# EAGLE board Silkscreen (EAGLE 7.7.0)
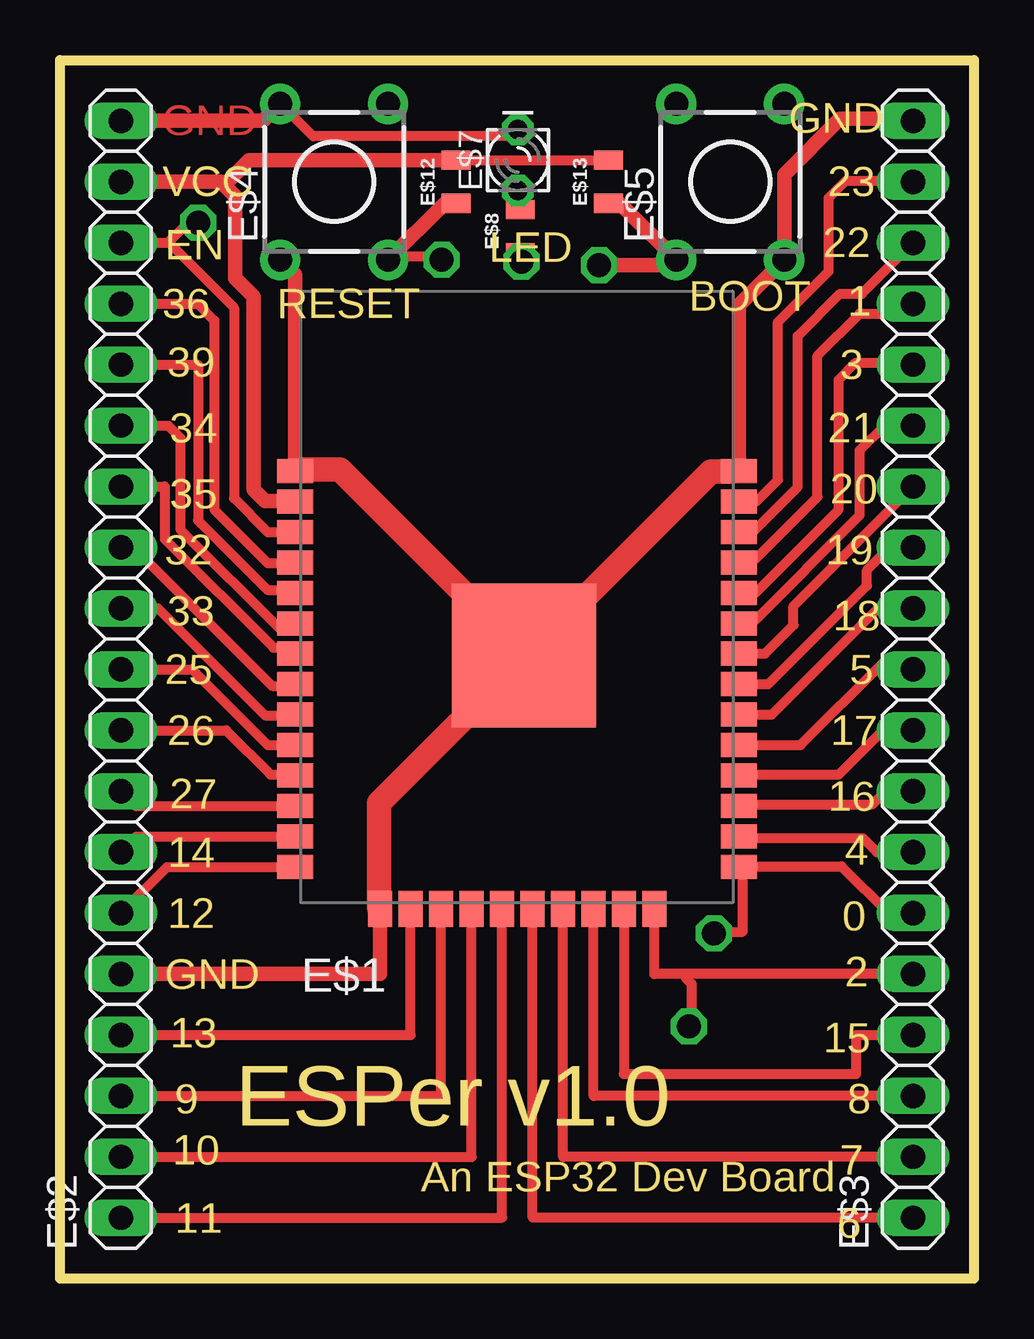
[diagram p0: board, top side]
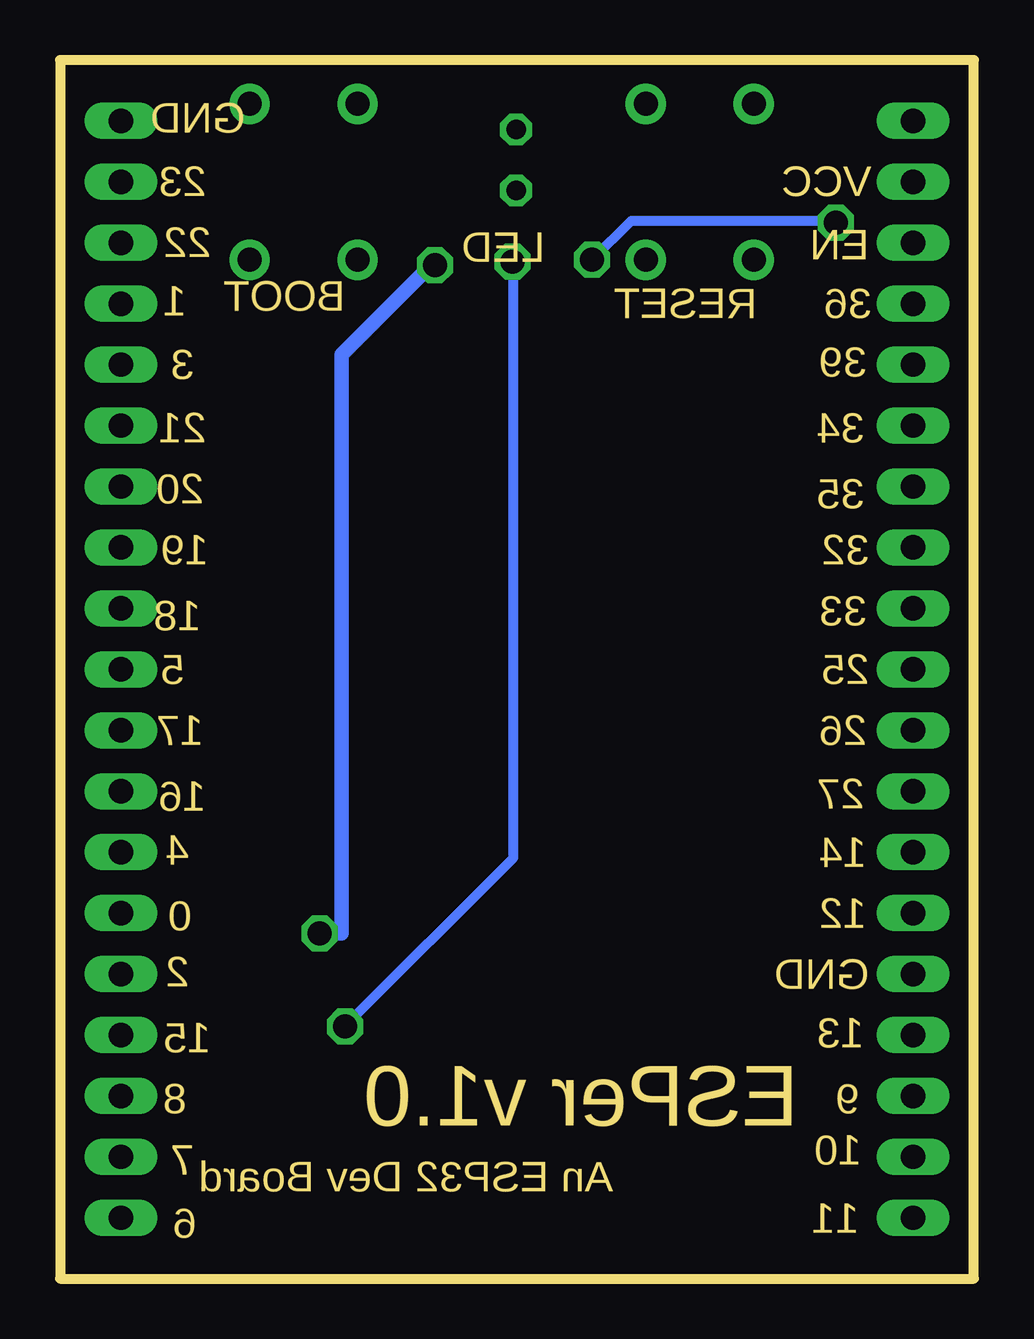
[diagram p1: board, bottom side, seen from below]

Size 38.1 x 50.8 mm. Coordinates in mm from the lower left corner, seen from the top.
Outline: 0,50.8 38.1,50.8 38.1,0 0,0 0,50.8
Copper layers (1*16): Top 0.035mm / dielectric 1.5mm / Bottom 0.035mm
Design rules "default": minimum track width 10mil, minimum drill 24mil, track to track 8mil, track to pad 8mil, pad to pad 8mil, via to via 8mil, smd to smd 8mil, copper to edge 40mil, drill to drill 8mil, minimum pad ring 10mil, minimum via ring 8mil, stop-mask expansion 4mil, vias tented up to drill 0mil, thermal gap 10mil

## Footprints (pad centres in the part's own frame; a part is rotated, then mirrored left to right if it is on the bottom)
ESP-WROOM-32 = smd 1.5 x 1: 1 -9.25,7; 2 -9.25,5.73; 3 -9.25,4.46; 4 -9.25,3.19; 5 -9.25,1.92; 6 -9.25,0.65; 7 -9.25,-0.62; 8 -9.25,-1.89; 9 -9.25,-3.16; 10 -9.25,-4.43; 11 -9.25,-5.7; 12 -9.25,-6.97; 13 -9.25,-8.24; 14 -9.25,-9.51; 25 9.25,-9.51; 26 9.25,-8.24; 27 9.25,-6.97; 28 9.25,-5.7; 29 9.25,-4.43; 30 9.25,-3.16; 31 9.25,-1.89; 32 9.25,-0.62; 33 9.25,0.65; 34 9.25,1.92; 35 9.25,3.19; 36 9.25,4.46; 37 9.25,5.73; 38 9.25,7 | smd 1 x 1.5: 15 -5.7,-11.25; 16 -4.43,-11.25; 17 -3.16,-11.25; 18 -1.89,-11.25; 19 -0.62,-11.25; 20 0.65,-11.25; 21 1.92,-11.25; 22 3.19,-11.25; 23 4.46,-11.25; 24 5.73,-11.25 | smd 6 x 6: GND 0.3,-0.7
1X19 = drill 1.016 long: 1 -22.86,0; 2 -20.32,0; 3 -17.78,0; 4 -15.24,0; 5 -12.7,0; 6 -10.16,0; 7 -7.62,0; 8 -5.08,0; 9 -2.54,0; 10 0,0; 11 2.54,0; 12 5.08,0; 13 7.62,0; 14 10.16,0; 15 12.7,0; 16 15.24,0; 17 17.78,0; 18 20.32,0; 19 22.86,0
TL1105 = drill 1 pad 1.676: 1 -2.25,3.25; 2 2.25,3.25; 3 -2.25,-3.25; 4 2.25,-3.25
LED_LD260 = drill 0.813 octagon: A -1.27,0; K 1.27,0
0805 = smd 0.8 x 1.2: 1 -0.9,0; 2 0.9,0

## Placement (x,y rotation side)
E$1  [ESP-WROOM-32]  19.05,26.67 0 top
E$2  [1X19]  2.54,25.4 90 top
E$3  [1X19]  35.56,25.4 90 top
E$4  [TL1105]  11.43,45.72 0 top
E$5  [TL1105]  27.94,45.72 0 top
E$7  [LED_LD260]  19.09,46.63 90 top
E$8  [0805]  19.19,43.66 90 top
E$12  [0805]  16.51,45.72 90 top
E$13  [0805]  22.86,45.72 90 top

## Library data of the parts
E$1 = esp32
E$2 E$3 = pinhead
E$4 E$5 = switch
E$7 = eagle-ltspice
E$8 E$12 E$13 = SparkFun-Resistors

## Nets
S$1: E$1.1 E$4.3
S$2: E$2.19 E$4.1
S$3: E$1.3 E$2.17
S$4: E$1.4 E$2.16
S$5: E$1.5 E$2.15
S$6: E$1.6 E$2.14
S$7: E$1.7 E$2.13
S$8: E$1.8 E$2.12
S$9: E$1.9 E$2.11
S$10: E$1.10 E$2.10
S$11: E$1.11 E$2.9
S$12: E$1.12 E$2.8
S$13: E$1.13 E$2.7
S$14: E$1.14 E$2.6
S$15: E$1.15 E$2.5
S$16: E$1.16 E$2.4
S$17: E$1.17 E$2.3
S$18: E$1.18 E$2.2
S$19: E$1.19 E$2.1
S$20: E$1.20 E$3.1
S$21: E$1.21 E$3.2
S$22: E$1.22 E$3.3
S$23: E$1.23 E$3.4
S$24: E$1.24 E$3.5
S$25: E$1.25 E$3.6
S$26: E$1.26 E$3.7
S$27: E$1.27 E$3.8
S$28: E$1.28 E$3.9
S$29: E$1.29 E$3.10
S$30: E$1.30 E$3.11
S$31: E$1.31 E$3.12
S$32: E$1.32 E$3.13
S$33: E$1.33 E$3.14
S$34: E$1.34 E$3.15
S$35: E$1.35 E$3.16
S$36: E$1.36 E$3.17
S$37: E$1.37 E$3.18
S$39: E$4.2
S$40: E$5.1
S$42: E$1.2 E$2.18 E$12.2 E$13.2
S$43: E$5.2
S$44: E$4.4 E$12.1
S$45: E$1.38 E$3.19 E$5.4
S$51: E$5.3 E$13.1

## Tracks (layer width: path | path; a pad name or v marks a point on that pad's centre or on a via)
S$1
  Top 0.61: E$4.3 9.8,41.85 E$1.1
S$2
  Top 0.61: E$2.19 8.47,48.26 E$4.1
S$3
  Top 0.406: E$2.17 4.54,43.18 7.25,40.47 7.25,32.53 8.66,31.12 E$1.3
S$4
  Top 0.406: E$2.16 5.73,40.64 6.43,39.94 6.43,32.06 8.66,29.83 9.77,29.83 E$1.4
S$5
  Top 0.406: E$2.15 5.76,38.1 5.76,31.6 8.65,28.71 9.68,28.71 E$1.5
S$6
  Top 0.406: E$2.14 4.52,35.56 5.02,35.06 5.02,31.24 9.19,27.06 9.55,27.06 E$1.6
S$7
  Top 0.406: E$2.13 4.36,33.02 4.37,33 4.37,30.83 8.9,26.3 9.55,26.3 E$1.7
S$8
  Top 0.406: E$2.12 3.07,30.48 8.84,24.71 9.73,24.71 E$1.8
S$9
  Top 0.406: E$2.11 4.09,27.94 8.55,23.48 9.77,23.48 E$1.9
S$10
  Top 0.406: E$2.10 5.51,25.4 8.66,22.24 E$1.10
S$11
  Top 0.406: E$2.9 6.93,22.86 8.78,21.01 9.76,21.01 E$1.11
S$12
  Top 0.406: E$2.8 3.16,19.7 E$1.12
S$13
  Top 0.406: E$2.7 3.19,18.43 E$1.13
S$14
  Top 0.406: E$2.6 4.46,17.16 E$1.14
S$15
  Top 0.61: E$2.5 13.35,12.7 E$1.15
S$16
  Top 0.406: E$2.4 14.62,10.16 E$1.16
S$17
  Top 0.406: E$2.3 15.89,7.62 E$1.17
S$18
  Top 0.406: E$2.2 17.16,5.08 E$1.18
S$19
  Top 0.406: E$2.1 18.43,2.54 E$1.19
S$20
  Top 0.406: E$3.1 19.7,2.54 E$1.20
S$21
  Top 0.406: E$3.2 20.97,5.08 E$1.21
S$22
  Top 0.406: E$3.3 22.24,7.62 E$1.22
S$23
  Top 0.406: E$1.23 23.51,8.53 33.19,8.53 33.19,10.16 E$3.4
S$24
  Top 0.406: E$3.5 24.78,12.7 E$1.24
S$25
  Top 0.406: E$3.6 34.53,15.24 32.58,17.19 28.33,17.19 E$1.25 28.26,17.12
S$26
  Top 0.406: E$1.26 28.37,18.36 33.46,18.36 34.04,17.78 E$3.7
S$27
  Top 0.406: E$1.27 28.38,19.77 33.87,19.77 34.42,20.32 E$3.8
S$28
  Top 0.406: E$1.28 28.34,21.01 32.46,21.01 34.31,22.86 E$3.9
S$29
  Top 0.406: E$1.29 30.87,22.24 34.28,25.65 35.31,25.65 E$3.10
S$30
  Top 0.406: E$1.30 29.67,23.51 34.11,27.95 E$3.11
S$31
  Top 0.406: E$1.31 29.53,24.78 33.64,28.89 33.64,29.54 34.63,30.53 35.51,30.53 E$3.12
S$32
  Top 0.406: E$1.32 29.39,26.05 30.58,27.24 30.58,28.04 E$3.13
S$33
  Top 0.406: E$1.33 28.84,27.32 33.34,31.83 33.34,34.53 34.4,35.59 35.53,35.59 E$3.14
S$34
  Top 0.406: E$1.34 28.99,28.59 32.46,32.06 32.46,37.47 33.17,38.18 35.48,38.18 E$3.15
S$35
  Top 0.406: E$1.35 28.85,29.86 31.58,32.59 31.58,38.47 33.34,40.23 35.15,40.23 E$3.16
S$36
  Top 0.406: E$1.36 28.88,31.13 30.76,33 30.76,39.29 32.52,41.06 33.44,41.06 E$3.17
S$37
  Top 0.406: E$1.37 29.04,32.4 29.93,33.3 29.93,39.88 32.05,42 32.05,45.05 32.75,45.76 35.52,45.76 E$3.18
S$38  (via drill 1)
  other vias: 5.76,44.02
S$41  (via drill 1)
  Bottom 0.406: 5.76,44.09 14.29,44.09 v15.92,42.47
S$42
  Top 0.406: E$12.2 E$13.2
  Top 0.61: E$2.18 6.71,45.72 6.84,45.58 | 6.84,45.58 7.31,45.11 7.31,41.7 8.08,40.94 8.08,32.88 8.55,32.41 9.79,32.41 E$1.2 | E$12.2 7.88,46.62 6.84,45.58
S$44
  Top 0.61: E$12.1 16.03,44.82 E$4.4
S$45
  Top 0.61: E$1.38 28.3,40.58 E$5.4 30.19,46.02 32.52,48.35 34.2,48.35 E$3.19
S$46
  Top 0.406: 5.9,44.02 5.34,44.02 4.63,43.31
S$47
  Top 1.016: 10.06,33.72 11.68,33.72 17.04,28.36
S$48
  Top 1.016: 16.83,23.35 13.31,19.82 13.31,15.45
S$49  (via drill 1)
  other vias: 27.27,14.39
S$50  (via drill 1)
  other vias: 22.47,42.26
S$51
  Top 0.61: E$13.1 23.34,44.82 E$5.3
S$52
  Bottom 0.61: 22.69,42.19 26.35,38.52 26.35,14.39 27.2,14.39
S$53
  Top 0.61: 22.4,42.47 22.4,42.26 25.86,42.26
S$54
  Top 0.406: 27.2,14.46 28.47,14.46 28.47,17
S$55
  Top 0.406: 16.13,42.61 13.66,42.61 13.66,42.75
S$56
  Top 0.406: 19.16,48.04 18.74,47.62 10.55,47.62 9.36,48.82 9.36,48.89
S$57
  Top 1.016: 28.05,33.65 27.13,33.65 22.05,28.57
S$58  (via drill 1)
  other vias: 26.21,10.51
S$59  (via drill 1)
  other vias: 19.23,42.4
S$60
  Bottom 0.406: 26.21,10.54 19.2,17.55 19.2,42.57
S$61
  Top 0.406: 19.08,45.48 19.25,45.31
S$62
  Top 0.406: 26.08,12.55 26.33,12.3 26.33,10.52
S$63
  Top 0.406: 19.21,45.3 19.21,44.36 19.06,44.51 19.01,44.51
S$64
  Top 0.406: 19.26,42.21 19.06,42.41 19.06,42.8 19.01,42.8

## Text on the board
Top: GND
Dimension: GND | VCC | 23 | 22 | EN | LED | 36 | RESET | BOOT | 1 | 39 | 3 | 34 | 21 | 35 | 20 | 32 | 19 | 33 | 18 | 25 | 5 | 26 | 17 | 27 | 16 | 14 | 4 | 12 | 0 | GND | 2 | 13 | 15 | 9 | 8 | ESPer v1.0 | 10 | An ESP32 Dev Board | 7 | 7 | 11 | 6